# Altium PCB SuperGameBro_RevA0.PcbDoc (part 2 of 2)
Units mil, origin at the board's own origin, x right, y up, seen from the top; angles counter-clockwise.
Board outline 6943 x 4294 mil, 4 copper layers (Top Layer, GND, 3V3P, Bottom Layer), stack 33.234 mil thick; 149 components, 155 nets, 708 pads, 342 vias.
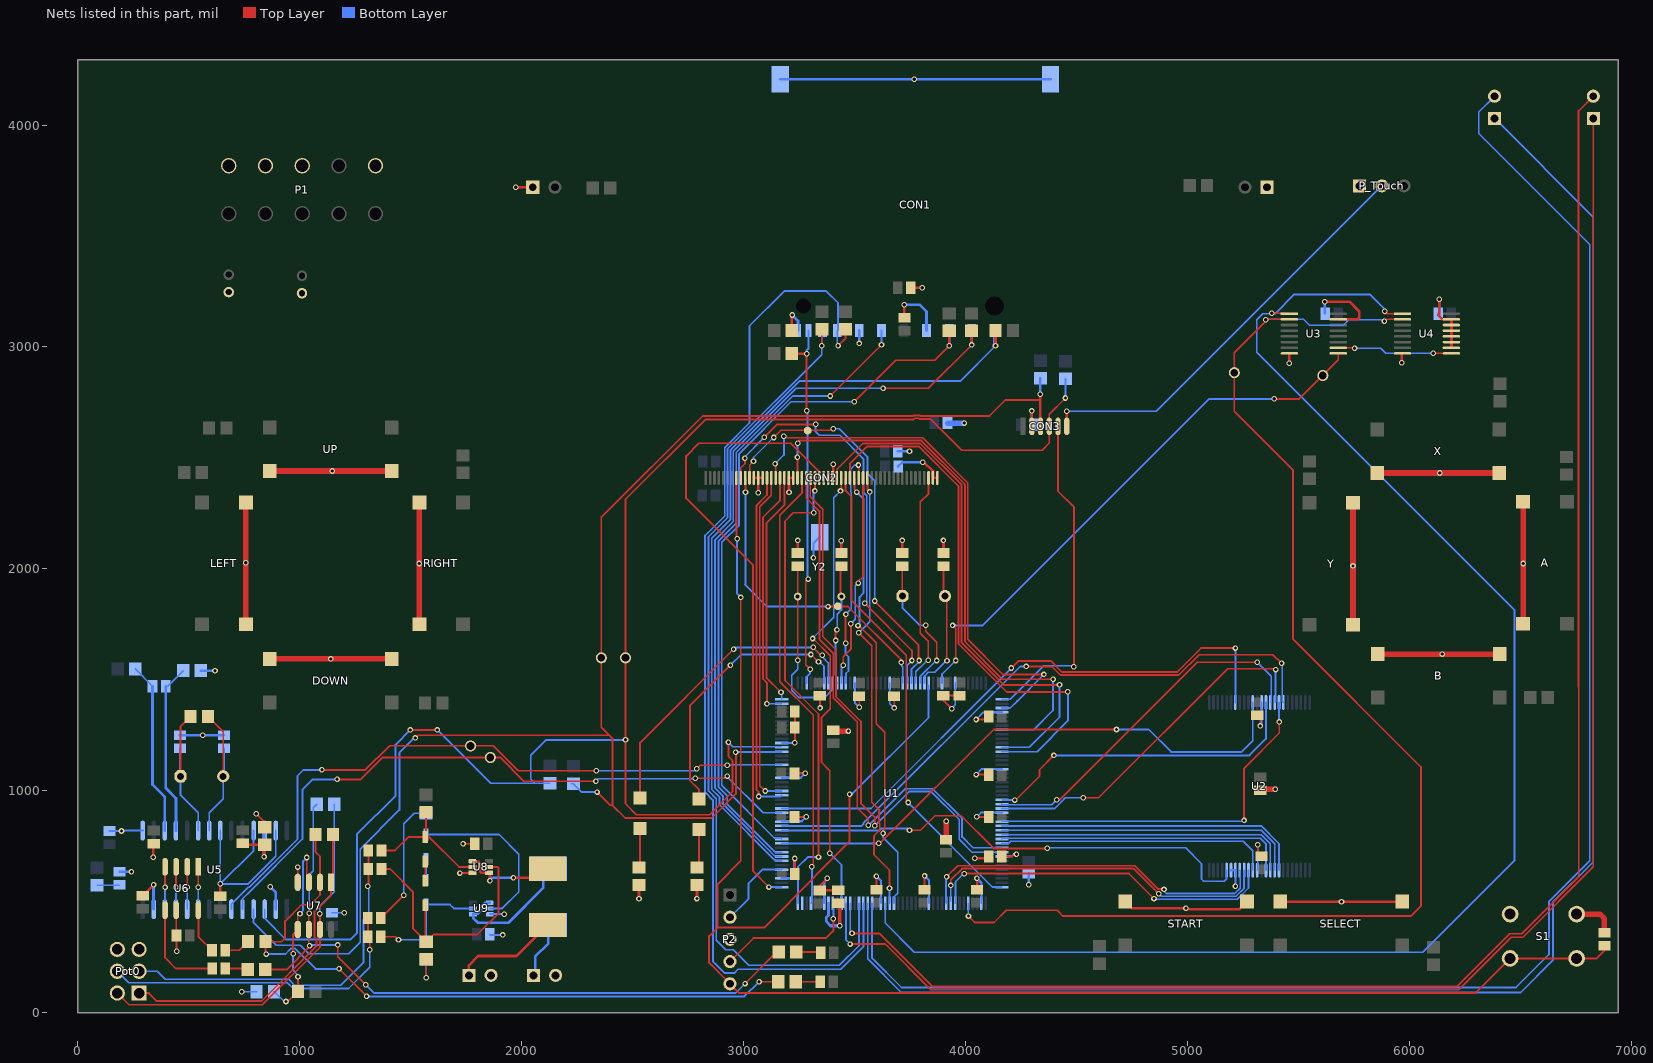
[diagram p4: the nets of this part, all layers, seen from the top]

## Via types
v1: diameter 25, hole 15, Top Layer to Bottom Layer, 342 vias

## Nets (pads, with @x,y where several pads share a name; then routed paths per layer and width w, separated by ;. In a path a pad name is that pad's centre, name@x,y a point inside that pad or via, vN(x,y) a via of type N, cw(c..) or ccw(c..) an arc to the next point about the centre after c; other vN are vias at no path point) (continued)
FMC_D3: U1.143 U2.11 | length 2571.2
  Top Layer w8: v1(3609.56,762.56) 3613.97,762.56 4127.41,1276 v1(4681,1276)
  Bottom Layer w8: U1.143@3172.17,762.56 v1(3609.56,762.56) ; v1(4681,1276) 4826,1276 4927,1175 5245,1175 5295.47,1225.47 U2.11@5295.47,1397.95
FMC_D4: U1.68 U2.14 | length 1484.4
  Top Layer w8: v1(4223,958) 4227,958 4334,1065 4334,1094 v1(4399,1159)
  Bottom Layer w8: U1.68@4165.7,958 v1(4223,958) ; v1(4399,1159) 5280,1159 5354.53,1233.53 U2.14@5354.53,1397.95
FMC_D5: U1.69 U2.15 | length 1624.4
  Top Layer w8: v1(4411.41,959.41) 4425.41,959.41 5045,1579 v1(5315,1579)
  Bottom Layer w8: U1.69@4164.29,939.73 4167.52,936.5 4388.5,936.5 v1(4411.41,959.41) ; v1(5315,1579) 5378,1516 5378,1401.74 U2.15@5376,1399.74
FMC_D6: U1.70 U2.16 | length 1644.7
  Top Layer w8: v1(4531,968) 4600,968 5182,1550 5394,1550 v1(5398,1546)
  Bottom Layer w8: U1.70@4164.29,920.04 4402.45,920.04 4432.91,950.5 4432.91,950.91 4450,968 v1(4531,968) ; U2.16@5395,1399.06 5398,1402.06 v1(5398,1546)
FMC_D7: U1.73 U2.17 | length 1720.7
  Top Layer w8: v1(5256,866) 5256,1101 5415,1260 v1(5415,1310)
  Bottom Layer w8: U1.73@4165.3,862 5252,862 v1(5256,866) ; v1(5415,1310) 5413.58,1311.42 U2.17@5413.58,1397.95 5418.36,1393.17 U2.17@5418.36,1370
FMC_D8: U1.74 U2.32 | length 1401.8
  Bottom Layer w8: U1.74@4164.29,841.3 5333.7,841.3 5413.58,761.42 U2.32@5413.58,642.05
FMC_D9: U1.75 U2.33 | length 1373.7
  Bottom Layer w8: U1.75@4164.29,821.62 5333.38,821.62 5393.9,761.1 U2.33@5393.9,642.05
FMC_D10: U1.76 U2.34 | length 1345.7
  Bottom Layer w8: U1.76@4164.29,801.93 5333.07,801.93 5374.21,760.79 U2.34@5374.21,642.05
FMC_D11: U1.77 U2.35 | length 1320.4
  Bottom Layer w8: U1.77@4164.29,782.24 4167.54,785.5 5329.5,785.5 5354.53,760.47 U2.35@5354.53,642.05
FMC_D12: U1.78 U2.38 | length 1240.6
  Bottom Layer w8: U1.78@4164.29,762.56 4194.56,762.56 4204.5,772.5 5252.5,772.5 5295.47,729.53 U2.38@5295.47,642.05
FMC_D13: U1.96 U2.39 | length 1583.1
  Top Layer w8: v1(3995.5,626.5) 4737.5,626.5 v1(4850,514)
  Bottom Layer w8: U1.96@3953.66,492.88 3955.5,494.71 3955.5,589.5 3987,621 3988,620 3994.5,626.5 v1(3995.5,626.5) ; v1(4850,514) 4853,511 5225.17,511 5275.79,561.61 U2.39@5275.79,642.05
FMC_D14: U1.97 U2.40 | length 1587.3
  Top Layer w8: v1(3934,573) 3934,598 3985,649 4758,649 v1(4872,535)
  Bottom Layer w8: U1.97@3934,502.46 v1(3934,573) ; v1(4872,535) 4883,524 5219.79,524 5256.1,560.31 U2.40@5256.1,642.05
FMC_D15: U1.98 U2.41 | length 1613
  Top Layer w8: v1(3915,612) 3965,662 4763.38,662 4868.88,556.5 4880.91,556.5 4882.41,555 v1(4895,555)
  Bottom Layer w8: U1.98@3915,493.59 3912.5,496.09 3912.5,609.5 v1(3915,612) ; v1(4895,555) 4895,547 4905,537 5214.41,537 5238.5,561.09 5238.5,639.96 U2.41@5236.42,642.05
GND: A.0 B.0 C1.1 C2.1 C3.1 C4.1 C5.1 C6.1 C7.1 C8.1 C9.1 C10.1 C11.1 C12.1 C13.2 C14.2 C15.2 C16.1 C17.1 C18.1 C19.1 C20.1 C21.1 C22.1 C23.1 C24.1 C25.1 C26.1 C27.1 C28.1 C29.1 C30.1 C31.1 C32.1 C34.1 C35.1 C36.1 C38.1 C39.1 C41.1 C42.1 C43.1 C44.1 C47.2 C57.1 C58.1 C62.1 C63.1 C64.1 C65.1 C80.1 CON1.3 CON1.6 CON2.A12 CON2.A13 CON2.A14 CON2.A20 CON2.A21 CON2.A28 CON2.A29 CON2.A30 CON2.A53 CON2.A54 CON3.2 CP1.1 CP2.1 DOWN.0 LEFT.0 LEFT_SHOULDER.1 LS1.2 LS2.2 P1.2 P1.4 P1.6 P1.10 P2.3 P_Touch.1 Pot0.3 Pot0.4 R22.1 R28.2 R33.2 R35.1 R40.2 R_LED0.2 R_LED1.2 RIGHT.0 RIGHT_SHOULDER.1 S1.1 SELECT.0 START.0 U1.14 U1.22 U1.37 U1.48 U1.61 U1.71 U1.90 U1.102 U1.113 U1.126 U1.135 U1.148 U1.158 U1.166 U2.13 U2.37 U2.42 U2.43 U3.8 U3.15 U4.8 U4.10 U4.11 U4.12 U4.13 U4.14 U4.15 U5.2 U5.13 U5.15 U5.22 U5.25 U5.27 U6.6 U7.4 U8.3 U9.3 UP.0 X.0 Y2.3 Y.0 | length 15621.2
  Top Layer w8: U6.6@443,462 443,348.47 C43.1@444.47,347 445,346.47 v1(445,277) ; v1(804,896) 842,858 R22.1@842,835.37 ; U7.4@991,587 v1(991,656) ; v1(1570,157) R33.2@1570,240.63 ; v1(1722,629) 1776.18,629 U8.3@1778,630.82 ; v1(1736,761) C57.1@1788.47,761 ; v1(3345,1373) C13.2@3345,1428.47 ; v1(3522,1376) C24.1@3522,1427.47 ; v1(3679,1373) C23.1@3679,1427.47 ; v1(3938,1370) 3901,1407 3901,1429.47 C21.1@3975,1429.47 ; v1(4048,1321) 4092.47,1321 C20.1@4105.47,1334 ; v1(4049,1073) C19.1@4106.47,1073 ; v1(4051,882) C18.1@4106.47,882 ; C29.1@5315,1339.47 5329,1325.47 v1(5329,1292) ; v1(5318,757) 5318,727.21 5315.16,724.37 C58.1@5335,704.53
  Top Layer w10: v1(340,700) 340,759.47 C36.1@342,761.47 ; C7.1@3230.53,882 v1(3283,882) ; C6.1@3230.53,1079 v1(3278,1079) ; v1(3231.53,1215.53) C5.1@3231.53,1358 ; v1(3378,605) 3345,572 3345,551.53 C15.2@3427,551.53 ; C10.1@3599,556.53 v1(3599,615) ; C11.1@3816,556.53 v1(3816,616) ; v1(4052,605) 4053,604 C12.1@4053,555.53
  Top Layer w12: C35.1@292,526.53 341,575.53 v1(341,576) ; C38.1@642,524.53 v1(642,580) ; v1(1974,3720) LEFT_SHOULDER.1@2050,3720 ; v1(2529,513) R_LED1.2@2529,575.63 ; v1(2790,514) R_LED0.2@2790,575.63 ; CON2.A12@3046.54,2410 CON2.A13@3066.22,2410 ; v1(3066.22,2342.78) CON2.A13@3066.22,2410 ; CON2.A14@3085.91,2410 CON2.A13@3066.22,2410 ; v1(3205,2345) 3205,2409.02 CON2.A20@3204.02,2410 CON2.A21@3223.7,2410 ; C8.1@3230.53,625 v1(3230.53,694.53) ; C3.1@3244,2071.53 v1(3244,2128) ; CON2.A28@3361.5,2410 CON2.A29@3381.18,2410 CON2.A30@3400.87,2410 3403.65,2412.78 3403.65,2470.64 v1(3404,2471) ; C4.1@3441,2071.53 v1(3441,2126) ; C1.1@3715,2071.53 v1(3715,2128) ; C27.1@3725,3132.53 v1(3725,3190) ; C28.1@3754.53,3267 v1(3806,3267) ; v1(3808,2480) 3814,2480 3853.62,2440.38 CON2.A53@3853.62,2410 CON2.A54@3873.31,2410 ; C2.1@3901,2071.53 v1(3901,2128) ; v1(4042,696) 4098.47,696 C14.2@4105.47,703 ; C20.1@4104.88,1334.59 C20.1@4104.88,1339.12 ; CON3.2@4299.37,2642.28 v1(4299.37,2711.63) ; START.0@4721,499 START.0@4720,500 4750,470 v1(4994,470) ; v1@4992,466 5235.21,466 START.0@5269.21,500 ; SELECT.0@5420,500 v1(5695,500) SELECT.0@5969.21,500 ; v1(5459,2926) 5459,2969.86 U3.8@5460,2970.87 ; v1(5619,3204) 5730.75,3204 5775,3159.75 5775,3133 5766.41,3124.41 U3.15@5680.47,3124.41 ; v1(5967,2929) 5967,2967.86 U4.8@5970,2970.87 ; v1(6135,3215) 6135,3146 6131.47,3142.47 6149.54,3124.41 U4.15@6190.47,3124.41 U4.14@6190.47,3098.82 U4.13@6190.47,3073.23 U4.12@6190.47,3047.64 U4.11@6190.47,3022.05 U4.10@6190.47,2996.46
  Top Layer w25: LEFT.0@757,1749.79 v1(757,2027) LEFT.0@757,2299 ; DOWN.0@864.79,1594 v1(1139,1594) DOWN.0@1414,1594 ; UP.0@864.79,2441 v1(1146,2441) UP.0@1414,2441 ; RIGHT.0@1539,1749.79 v1(1539,2024) RIGHT.0@1539,2299 ; C16.1@3405,1273.53 3409.53,1269 v1(3473,1269) ; C17.1@3913,780.53 v1(3913,862) ; C30.1@5329,1002.47 5331,1000.47 5336.53,1006 v1(5397,1006) ; Y.0@5747,1747.79 v1(5747,2013) Y.0@5747,2297 ; X.0@5856.79,2432 v1(6138,2432) X.0@6406,2432 ; B.0@5859,1616 v1(6149,1616) B.0@6408.21,1616 ; A.0@6514,1753 v1(6514,2024) A.0@6514,2302.21 ; S1.1@6754.75,444.13 6859.39,444.13 6880,423.53 C26.1@6880,360.53
  Bottom Layer w8: U5.22@642,820.33 v1(642,580) ; v1(739,94) R35.1@804.63,94 ; U5.25@792,820.33 792,730 v1(642,580) ; U5.27@892,820.33 892,705 767,580 v1(642,580) ; C47.2@1145,449.53 v1(1200.47,449.53) ; v1(1570,157) R40.2@1570,239.63 ; U9.3@1856,443.82 v1(1921.82,443.82) ; C44.1@1856.53,353 1859.53,350 v1(1915,350) ; U1.14@3501.91,1486 3501.91,1396.09 v1(3522,1376) ; U1.22@3659.38,1486 3659.38,1392.62 v1(3679,1373) ; v1(3938,1370) 3954.66,1386.66 U1.37@3954.66,1486 ; v1(4048,1321) 4080.11,1353.11 4125.89,1353.11 ; v1(4049,1073) 4074.2,1098.2 U1.61@4165.29,1098.2 ; v1(4051,882) 4070.35,901.35 U1.71@4165.29,901.35 ; v1@5216.73,570.27 v1(5217,570) U2.42@5217,641.78 ; U2.37@5315.16,642.05 5318,644.89 v1(5318,757) ; v1(5329,1292) 5334.84,1297.84 U2.13@5334.84,1397.95
  Bottom Layer w10: C41.1@143,818.53 v1(196.53,818.53) ; C42.1@188,634.53 v1(241.47,634.53) ; v1@198.33,820.33 U5.15@292,820.33 ; U1.148@3173.17,861.99 3262.99,861.99 v1(3283,882) ; U1.158@3173.17,1058.84 3257.84,1058.84 v1(3278,1079) ; U1.166@3173.95,1215.53 v1(3231.53,1215.53) ; v1(3315,2050) 3315,2115.14 Y2.3@3342.57,2142.72 ; U1.126@3364.11,493.88 3364.11,588.89 3378,602.78 v1(3378,605) ; v1(3599,615) 3620.02,593.98 U1.113@3620.02,493.88 ; v1(3816,616) 3836.55,595.45 U1.102@3836.55,493.88 ; v1(4052,605) 4072.77,584.23 U1.90@4072.77,493.88
  Bottom Layer w12: v1(341,576) 341,467 U5.13@342,466 ; C34.1@460,1250.53 v1(562.53,1250.53) C39.1@658,1250.53 ; R28.2@553.37,1541 v1(618,1541) ; v1(867,567) 892,542 U5.2@892,466 ; CON1.3@3165.48,4206.16 v1(3770.16,4206.16) CON1.6@4383.59,4206.16 ; U1.135@3172.17,605.08 3217.08,605.08 3230,618 3230,694 v1(3230.53,694.53) ; v1(3522.17,3015.83) CON1.6@3522.17,3074.27 ; C63.1@3695.53,2530 v1(3748,2530) ; C62.1@3696.53,2461 3715.53,2480 v1(3808,2480) ; v1(3725,3190) 3795,3190 3824.93,3160.07 CON1.3@3824.93,3074.27 ; 4125.89,1353.11 U1.48@4164.29,1353.11 ; v1(4286,576) C80.1@4286,625.47 ; C64.1@4299.37,2659.16 v1(4299.37,2711.63) ; U2.43@5197.05,642.05 U2.42@5216.73,642.05 ; C31.1@5619,3152.47 v1(5619,3204) ; C32.1@6131.47,3150 6135,3153.53 v1(6135,3215)
  Bottom Layer w25: C65.1@3919.53,2657 v1(3995,2657)
I2C1_SCL: CON3.3 pad.0 R20.2 R23.1 U1.164 U5.4 | length 7508.4
  Top Layer w8: v1(1521,1238) 1533.5,1250.5 2394.5,1250.5 ; v1(2340,994) 2399,935 2409,935 ; v1(2964,1174) 2965.5,1172.5 2965.5,985.5 2857,877 2467,877 2409,935 ; 4338,2761 4180,2761 4108,2689 3797.79,2689 3795.29,2691.5 3766.71,2691.5 3764.21,2689 2816,2689 2359,2232 2359,1286 2409,1236 2409,935
  Top Layer w12: 4337,2762 v1(4337,2787) ; CON3.3@4338,2643.02 4338,2761
  Bottom Layer w8: U5.4@792,466 792,405 893.5,303.5 1001.5,303.5 1040,265 1220,265 1272.5,317.5 1272.5,737.07 1449,913.57 1449,1171 1516,1238 v1(1521,1238) ; R23.1@2223.37,1031.63 R23.1@2233,1031.63 2270.63,994 v1(2340,994) ; v1(2964,1174) 3170.22,1174 U1.164@3172.17,1175.94
  Bottom Layer w12: v1(4337,2787) 4337,2857.63 R20.2@4338,2858.63
I2C1_SDA: CON3.4 pad.1 R21.2 R24.1 U1.165 U5.3 | length 7688.7
  Top Layer w8: v1(1498,1274) v1(1620,1274) ; v1(2932,1218) 2932,1155.61 2950.5,1137.11 2950.5,995.5 2847,892 2517.21,892 2468,941.21 2468,2313 2827.5,2672.5 3766.09,2672.5 3772.09,2678.5 3789.91,2678.5 3793.41,2675 3843,2675 3983,2535 4346,2535 4378.11,2567.11 CON3.4@4378.11,2642.28 4378.11,2697.11 v1(4451,2770)
  Bottom Layer w8: U5.3@842,466 842,425 938,329 1228,329 1257.5,358.5 1257.5,803.5 1432,978 1432,1208 v1(1498,1274) ; v1(1620,1274) 1860.37,1033.63 2060.37,1033.63 ; R24.1@2127,1033.63 2060.37,1033.63 ; v1(2468,1229) 2111,1229 2041,1159 2041,1053 2060.37,1033.63 ; v1(2932,1218) 2951.59,1198.41 U1.165@3169.39,1198.41 ; v1(4451,2770) R21.2@4451,2856.63
INPUT_LATCH: U1.112 U3.1 U4.1 | length 6899.7
  Top Layer w8: v1(5380,3152) 5458,3152 U3.1@5460,3150 ; v1(5890,3161) 5890,3152 5892,3150 U4.1@5970,3150
  Bottom Layer w8: U1.112@3638.7,492.88 3638.7,404 3770.2,272.5 6060.5,272.5 6475,687 6475,1814 5313,2976 5313,3122 5341,3150 5395.87,3150 5482.86,3237 5823,3237 5890,3170 v1(5890,3161)
LCD_SPI_NEN: CON2.A9 U1.26 | length 1900.7
  Top Layer w8: CON2.A9@2987.48,2410 2987.48,2454.48 3006.5,2473.5 v1(3006.5,2498) ; v1(3094,2593) 3152,2651 v1(3325,2651) ; v1(3547,1845) 3546,1845 3759,1632 v1(3759,1587)
  Bottom Layer w8: v1(3006.5,2498) 3006.5,2505.5 v1(3094,2593) ; v1(3325,2651) 3325,2621 3324,2620 3342,2602 3435,2602 3540.35,2496.65 3540.35,2344.94 3555.5,2329.79 3555.5,1853.5 v1(3547,1845) ; U1.26@3737.13,1485 3737.13,1565.13 v1(3759,1587)
LCKT: U5.11 U6.3 | length 191.4
  Top Layer w8: v1@442,556 442,656 U6.3@443,657
  Bottom Layer w8: U5.11@442,466 v1@442,556
  other v1: 442,565
LTDC_B3: CON2.A15 U1.154 | length 1566.1
  Top Layer w8: v1(3068,974) 3068,994.6 3058,1004.6 3058,2285.21 3105.59,2332.8 CON2.A15@3105.59,2410
  Bottom Layer w8: v1(3068,974) 3068.32,974.32 3167.39,974.32 U1.154@3172.17,979.09
LTDC_B4: CON2.A16 U1.155 | length 1517.9
  Top Layer w8: v1(3097.22,998.78) 3073,1023 3073,2279 3125.28,2331.28 CON2.A16@3125.28,2410
  Bottom Layer w8: v1(3097.22,998.78) U1.155@3172.17,998.78
LTDC_B5: CON2.A17 U1.47 | length 2488
  Top Layer w8: v1(3142,2473) 3144.96,2470.04 CON2.A17@3144.96,2410 ; v1(3182,2598) 3189,2591 3807,2591 4011,2387 4011,1682 4169,1524 v1(4354,1524)
  Bottom Layer w8: v1(3142,2473) 3182,2513 v1(3182,2598) ; U1.47@4164.29,1372.79 4201.79,1372.79 4233,1404 4234,1404 v1(4354,1524)
LTDC_B6: CON2.A18 U1.175 | length 1123.2
  Top Layer w8: v1(3105.48,1392.48) 3105.48,1486.31 3088,1503.79 3088,2233 3164.65,2309.65 CON2.A18@3164.65,2410
  Bottom Layer w8: v1(3105.48,1392.48) U1.175@3172.17,1392.48
LTDC_B7: CON2.A19 U1.176 | length 1060.9
  Top Layer w8: v1(3169,1444) 3103,1510 3103,2205 3184.33,2286.33 3184.33,2335.26 3183.5,2336.09 3183.5,2409.17 CON2.A19@3184.33,2410
  Bottom Layer w8: v1(3169,1444) 3172.17,1440.83 U1.176@3172.17,1412.17
LTDC_CLK: CON2.A38 U1.111 | length 2023
  Top Layer w8: v1(3519,1712.31) 3578,1653.31 3578,948 3614,912 3611,909 3611,853.41 3613.5,850.91 3613.5,822.91 3588.06,797.47 3588.06,711.94 3658,642 v1(3658,560) ; CON2.A38@3558.35,2410 3558.35,2357.35 v1(3569,2346.69)
  Bottom Layer w8: v1(3519,1712.31) 3569,1762.31 v1(3569,2346.69) ; U1.111@3658,493.26 v1(3658,560)
LTDC_DE: CON2.A52 U1.28 | length 971.5
  Top Layer w8: v1@3827,1587 3827,1586 3833,1592 3833,1673.77 3796.5,1710.27 3796.5,2301.5 3833.94,2338.94 CON2.A52@3833.94,2410
  Bottom Layer w8: U1.28@3776.49,1485 3776.49,1535.49 3821,1580
  other v1: 3833,1588
LTDC_G2: CON2.A22 U1.52 | length 2599.4
  Top Layer w8: v1(3243,2503) 3243,2410.39 CON2.A22@3243.39,2410 ; v1(3244,2566) 3244,2573 3249,2578 3801.62,2578 3998,2381.62 3998,1671 4166.5,1502.5 4394.5,1502.5 v1(4395,1503)
  Bottom Layer w8: v1(3243,2503) 3243,2572 3243.39,2572.39 3244,2571.77 v1(3244,2566) ; U1.52@4164.29,1274.37 4307.37,1274.37 4395,1362 v1(4395,1503)
LTDC_G3: CON2.A23 U1.129 | length 2025.4
  Top Layer w8: CON2.A23@3263.07,2410 3263.07,2341.07 3163,2241 3163,1492 3313.81,1341.19 3313.81,662.81 v1(3308,657)
  Bottom Layer w8: U1.129@3304.05,492.88 3308.83,497.66 v1@3308.83,657
LTDC_G4: CON2.A24 U1.79 | length 2511.6
  Top Layer w8: CON2.A24@3282.76,2410 3282.76,2319.48 3342,2260.23 3342,1682 3404,1620 3404,1418.62 3513,1309.62 3513,922 3562,873 v1(3562,844)
  Bottom Layer w8: v1(3562,844) 3563.59,844 3728.59,1009 3851.77,1009 3985,875.77 3985,792 4034.12,742.88 U1.79@4164.29,742.88
LTDC_G5: CON2.A25 U1.80 | length 2491
  Top Layer w8: CON2.A25@3302.44,2410 3300.5,2408.06 3300.5,2324.5 3357,2268 3357,1695 3417,1635 3417,1424 3529,1312 3529,943 3592,880 v1(3592,842)
  Bottom Layer w8: v1(3592,842) 3746,996 3846.38,996 3972,870.38 3972,781 4029.81,723.19 U1.80@4164.29,723.19
LTDC_G6: CON2.A26 U1.132 | length 2167.4
  Top Layer w8: v1(3316,2253) 3225,2253 3187,2215 3187,1497 3338,1346 v1(3338,701) ; v1(3322,2351) CON2.A26@3322,2409.88
  Bottom Layer w8: U1.132@3245,492.88 3245,656 3290,701 v1(3338,701) ; v1(3316,2253) 3316,2357 v1(3322,2351)
LTDC_G7: CON2.A27 U1.133 | length 2859.8
  Top Layer w8: v1(3114.71,565.71) 3043,637.42 3043,2017 2741,2319 2741,2508 2799,2566 3212.8,2566 3341.81,2436.99 CON2.A27@3341.81,2410
  Bottom Layer w8: v1(3114.71,565.71) U1.133@3172.17,565.71
LTDC_HSYNC: CON2.A36 U1.12 | length 1086
  Top Layer w8: v1(3460,1665) 3460,1794 v1(3461.53,1795.53) ; v1(3518,2468) 3518,2463 v1@3518.98,2462.02 ; CON2.A36@3518.98,2410 v1@3518.98,2460
  Bottom Layer w8: v1(3460,1665) 3460,1615.94 3473,1602.94 3473,1539.6 3461.53,1528.13 U1.12@3461.53,1485 ; v1(3461.53,1795.53) 3486,1820 3486,2345.54 3483,2348.54 3483,2450 3501,2468 v1(3518,2468)
LTDC_R3: CON2.A31 U1.56 | length 2417.2
  Top Layer w8: CON2.A31@3418.65,2411.91 3418.65,2420.87 3422,2424.23 3422,2450 3537,2565 3796.23,2565 3983,2378.23 3983,1667.62 4173.62,1477 v1(4424,1477)
  Bottom Layer w8: U1.56@4164.29,1195.63 4287.63,1195.63 4424,1332 v1(4424,1477)
LTDC_R4: CON2.A32 U1.122 | length 2058.5
  Top Layer w8: v1(3311,1686) 3313.23,1686 3391,1608.23 3391,1370 3352,1331 3352,1127 3389,1090 v1(3389,718) ; v1(3437,2351) 3440.24,2354.24 CON2.A32@3440.24,2410
  Bottom Layer w8: v1(3311,1686) 3407,1782 3407,2321 v1(3437,2351) ; v1(3389,718) 3441.85,665.15 U1.122@3441.85,492.88
LTDC_R5: CON2.A33 U1.88 | length 2171.5
  Top Layer w8: CON2.A33@3459.92,2410 3459.92,2351.08 3487,2324 3487,1857 3733.12,1610.88 3733.12,947 v1(3742,947)
  Bottom Layer w8: v1@3738,950 4122.29,565.71 U1.88@4164.29,565.71 ; v1@3741,947 v1(3742,947)
LTDC_R6: CON2.A34 U1.57 | length 2440.2
  Top Layer w8: CON2.A34@3479.61,2410 3479.61,2473.61 3558,2552 3790,2552 3969,2373 3969,1662 4186,1445 4461,1445 v1(4462,1446)
  Bottom Layer w8: U1.57@4164.29,1175.94 4322.94,1175.94 4462,1315 v1(4462,1446)
LTDC_R7: CON2.A35 U1.110 | length 2041.2
  Top Layer w8: CON2.A35@3500,2409.29 3500,2357 v1(3511,2346) ; v1@3514,1743.46 3517.54,1747 3598,1666.54 3598,1302 3637,1263 3637,830 3629,822 v1(3629,808) ; v1@3514.85,1744.31 v1(3516,1744.31)
  Bottom Layer w8: v1(3511,2346) 3540.5,2316.5 3540.5,1890.29 3523,1872.79 3523,1755 3514,1746 3515.69,1744.31 v1(3516,1744.31) ; v1(3629,808) 3629,788 3695,722 3695,538.28 3678.07,521.35 U1.110@3678.07,492.88
LTDC_VSYNC: CON2.A37 U1.11 | length 965.5
  Top Layer w8: v1(3449,1565) 3449,1604 3485,1640 v1(3484,1752) ; v1(3517,1936) 3517,1943.34 3538.66,1965 CON2.A37@3538.66,2410
  Bottom Layer w8: U1.11@3441.85,1485 3441.85,1557.85 v1(3449,1565) ; v1(3484,1752) 3504,1772 3504,1923 v1(3517,1936)
MCLK: U5.12 U6.4 | length 191.4
  Top Layer w8: v1(393,565) U6.4@393,657
  Bottom Layer w8: U5.12@392,466 392,564 v1(393,565)
MP3_DR: U1.131
NetC33_2: C33.2 R22.2 U5.26 | length 274.9
  Top Layer w12: C33.2@743,762.47 748.84,756.63 R22.2@842,756.63 839,753.63 v1(839,703)
  Bottom Layer w12: v1(839,703) 839,817.33 U5.26@842,820.33
NetC42_2: C42.2 R27.2 | length 99.2
  Bottom Layer w8: R27.2@87,573.63 C42.2@186.16,573.63
NetC45_1: C45.1 C50.1 Pot0.2 | length 1596.5
  Top Layer w8: v1@1309.47,570 C50.1@1309.47,647 C45.1@1309.47,731
  Bottom Layer w8: Pot0.2@276,186.43 357.57,186.43 394,150 949.55,150 976.05,123.5 1184.5,123.5 1287.5,226.5 1287.5,420.79 1311,444.29 1311,565 v1(1306,570)
NetC46_2: C46.2 R31.1 | length 119.3
  Top Layer w8: C46.2@663.53,280.59 727.63,280.59 R31.1@766.63,319.59
NetC48_1: C48.1 U8.1 U8.4 | length 450.8
  Top Layer w12: U8.1@1778,682 1780,680 1805,680 1814,671 1814,635 1818.18,630.82 U8.4@1852.8,630.82 1857,626.62 v1(1857,594) ; v1(1963,608) 2057.23,608 2066.23,599 C48.1@2116,648.77
  Bottom Layer w12: v1(1857,594) 1854,597 1865,608 v1(1963,608)
NetC48_2: C48.2 LS1.1 | length 474.5
  Top Layer w12: LS1.1@1762,168 1762,213 1804,255 1975.77,255 C48.2@2116,395.23
NetC49_2: C49.2 R32.1 | length 110.1
  Top Layer w8: R32.1@3235.37,139 C49.2@3345.47,139
NetC51_1: C51.1 U9.1 U9.4 | length 609.1
  Bottom Layer w12: U9.1@1856,495 1834,495 1819,480 1819,463 1801,445 1782.38,445 U9.4@1781.2,443.82 1781.2,426.8 1803,405 1940,405 2097,562 2097,625.77 C51.1@2120,648.77
NetC51_2: C51.2 LS2.1 | length 255
  Bottom Layer w12: LS2.1@2053,168 2061,176 2061,252 2120,311 C51.2@2120,395.23
NetC52_1: C52.1 C56.1 Pot0.5 | length 1449.8
  Top Layer w8: Pot0.5@177.57,186.43 Pot0.5@192.57,186.43 ; C52.1@1306.47,426 1307,425.47 1307,354 1315,346 v1(1315,283)
  Bottom Layer w8: Pot0.5@177.57,186.43 229,135 943.34,135 969.84,108.5 1219.5,108.5 1315,204 v1(1315,283)
NetC53_2: C53.2 R38.1 | length 103
  Top Layer w8: C53.2@664.53,198.59 761.04,198.59 R38.1@765.63,194
NetC55_2: C55.2 R39.1 | length 111.1
  Top Layer w8: R39.1@3238.37,273.31 C55.2@3349.47,273.31
NetCON1_11: CON1.11 R7.2 | length 151.3
  Top Layer w12: R7.2@3217.37,3074 3217.37,3142.37 v1(3219,3144)
  Bottom Layer w12: v1(3219,3144) 3245.4,3117.6 CON1.11@3245.4,3074.27
NetD1_K: D1.K D2.A | length 86.8
  Top Layer w8: D2.A@1566,594.12 D1.K@1566,680.88
NetD3_K: D3.K D4.A | length 95.8
  Bottom Layer w8: D4.A@1569,597.12 D3.K@1569,692.88
NetLED0_K: LED0.K R_LED0.1 | length 161.7
  Top Layer w8: R_LED0.1@2799,663.37 LED0.K@2799,825.1
NetLED1_K: LED1.K R_LED1.1 | length 170.7
  Top Layer w8: R_LED1.1@2534,659.37 LED1.K@2534,830.1
NetPot0_1: Pot0.1 R30.2 U7.1 | length 1457.8
  Top Layer w8: Pot0.1@276,88 320,88 356,52 827.55,52 1076,300.45 1076,331.6 1066.5,341.1 1066.5,454.73 1080.27,468.5 1080.5,468.5 1141,529 U7.1@1141,587 1149.37,595.37 R30.2@1149.37,802
NetPot0_6: Pot0.6 R37.2 U7.7 | length 1715
  Top Layer w8: Pot0.6@177.57,88 230.57,35 831.77,35 1091,294.23 U7.7@1091,374.4 1091,444 v1(1090,445)
  Bottom Layer w8: v1(1090,445) 1090,480 1155.37,545.37 R37.2@1155.37,939
NetR30_1: R30.1 R31.2 R32.2 U7.2 | length 3149.4
  Top Layer w8: v1(849,264) 845.37,267.63 R31.2@845.37,319.59 917.59,319.59 934,336 934,412.23 1007.77,486 1047,486 1091,530 U7.2@1091,587 1091,705 1070.63,725.37 R30.1@1070.63,802 ; v1(1177,197) v1(1301,73) ; v1(3070,139) R32.2@3156.63,139
  Bottom Layer w8: v1(849,264) 935.77,264 960.27,288.5 979.73,288.5 1071.23,197 v1(1177,197) ; v1(1301,73) 3004,73 v1(3070,139)
NetR34_2: R34.2 R35.2 U7.3 U7.5 | length 901.2
  Top Layer w8: v1(938,50) 946.63,50 R34.2@991.63,95 991,95.63 992,96.63 v1(992,162) ; v1(970,265) 970,353.4 U7.5@991,374.4 991,436 v1(1001,446) ; v1(1031,699) 1031,597 U7.3@1041,587
  Bottom Layer w8: R35.2@883.37,94 884.37,95 929.37,50 v1(938,50) ; v1(970,265) 970,191 992,169 v1(992,162) ; v1(1001,446) 1015,460 1015,683 v1(1031,699)
NetR37_1: R37.1 R38.2 R39.2 U7.6 | length 3213
  Top Layer w8: R38.2@844.37,194 941,194 1041,294 U7.6@1041,374.4 1041,446 v1(1043,448) ; v1(1171,305) 1171,252 v1(1298,125) ; v1(3007,131) 3148.31,272.31 R39.2@3158.63,272.31
  Bottom Layer w8: v1(1043,448) 1043,621.79 1061,639.79 1061,923.37 R37.1@1076.63,939 ; v1@1044,297 1052,305 v1(1171,305) ; v1(1298,125) 1335,88 2964,88 v1(3007,131)
  other v1: 1044,302
NWAKE_TOUCH: CON3.6 P_Touch.2 | length 1908.6
  Top Layer w12: CON3.6@4456.85,2642.28 v1(4456.85,2709.85)
  Bottom Layer w8: v1(4456.85,2709.85) 4860.85,2709.85 P_Touch.2@5877,3726
OSC_MAIN_IN: C1.2 U1.29 Y1.1 | length 639.3
  Top Layer w8: Y1.1@3715,1877.94 C1.2@3715,2012.47 ; v1(3821,1746) 3821,1719 3871,1669 v1(3871,1587)
  Bottom Layer w8: Y1.1@3715.94,1877 3715.94,1824.06 3794,1746 v1(3821,1746) ; U1.29@3796.18,1485 3796.18,1515.18 3868,1587 v1(3871,1587)
OSC_MAIN_OUT: C2.2 U1.30 Y1.2 | length 597.1
  Top Layer w8: Y1.2@3901,1884.06 C2.2@3901,2012.47 ; Y1.2@3908.06,1877 3916,1869.06 3916,1595.87 3907.13,1587 3908.13,1586 v1(3917,1586)
  Bottom Layer w8: U1.30@3815.87,1485 3815.87,1516.48 3833.38,1534 3861,1534 3913,1586 v1(3917,1586)
OSC_RTC_IN: C3.2 U1.9 Y2.1 | length 782.6
  Top Layer w8: Y2.1@3244,1877.94 C3.2@3244,2012.47 ; v1(3244.15,1587.85) Y2.1@3244.15,1875
  Bottom Layer w8: v1(3244.15,1587.85) 3244.15,1548.15 3217,1521 3217,1452 3249,1420 3365.95,1420 U1.9@3402.48,1456.52
OSC_RTC_OUT: C4.2 U1.10 Y2.2 | length 540.9
  Top Layer w8: v1@3415,1671.33 v1(3415,1677) 3415,1720 v1(3421,1726) ; Y2.2@3437.06,1877 C4.2@3437.06,2008.54
  Bottom Layer w8: v1(3415,1677) 3415,1520.64 3417.39,1518.26 3417.39,1489.78 U1.10@3422.17,1485 ; v1(3421,1726) 3422,1727 3422,1796 3441,1815 Y2.2@3441,1875
OUTL: C46.1 U6.8 | length 206.9
  Top Layer w8: U6.8@543,462 543,342.06 C46.1@604.47,280.59
OUTR: C53.1 U6.5 | length 447.5
  Top Layer w8: U6.5@393,462 393,247 441.41,198.59 C53.1@605.47,198.59
PVDD: C40.2 R26.2 U5.17 | length 784
  Bottom Layer w8: R26.2@258.37,1549 C40.2@336.37,1471
  Bottom Layer w12: C40.2@336.47,1471 336.47,1027.53 392,972 U5.17@392,820.33
PVSS: C40.1 R28.1 U5.18 | length 778
  Bottom Layer w8: C40.1@395.53,1471 404.63,1471 R28.1@474.63,1541
  Bottom Layer w12: C40.1@395.53,1471 396,1470.53 396,1012 442,966 U5.18@442,820.33
RAM_NCS: U1.151 U2.7 | length 2631.1
  Top Layer w8: v1@4207.31,1552.69 4239.62,1585 4385,1585 4435.5,1534.5 4953.5,1534.5 5062,1643 v1(5217,1643)
  Bottom Layer w8: U1.151@3172.17,920.04 3574.66,920.04 4207,1552.38 v1(4207,1553) ; U2.7@5217,1398.22 v1(5217,1643)
RAM_NOE: U1.146 U2.44 | length 2247.8
  Top Layer w8: v1(3748,821.62) 3797.62,821.62 3863,887 3980,887 4127,740 v1(4369,740)
  Bottom Layer w8: U1.146@3172.17,821.62 3173.28,820.5 3611.09,820.5 3620.09,829.5 3740.12,829.5 v1(3748,821.62) ; v1(4369,740) 4371.5,742.5 4992.5,742.5 5064,671 5064,602 5074,592 5166,592 5177.36,603.36 U2.44@5177.36,642.05
RAM_NWE: U1.147 U2.18 | length 2802.2
  Top Layer w8: v1(4274,1560) 4388.79,1560 4427.29,1521.5 4961.71,1521.5 5053.21,1613 5386,1613 v1(5425,1574)
  Bottom Layer w8: U1.147@3172.17,841.3 3533.3,841.3 3540.5,848.5 3540.5,852.91 4247.59,1560 v1(4274,1560) ; v1(5425,1574) 5428.49,1570.51 5428.49,1402.73 U2.18@5433,1398.22
RESET: C26.2 CON2.A8 P2.5 S1.0 U1.31 | length 8038.2
  Top Layer w8: CON2.A8@2967.8,2410 2967.8,2139.2 v1(2971,2136) ; v1(2988,1871) 2987.5,1871.5 2987.5,683.5 2883,579 2883,383 ; v1(3478,984) 3478,771.41 3323.5,616.91 3323.5,613.96 3092.54,383 2883,383 ; 6880,278.47 6845.66,244.13 S1.0@6754.75,244.13 S1.0@6454.75,244.13 6298.61,88 2981,88 P2.5@2939,130 2845,224 2845,345 2883,383
  Bottom Layer w8: v1(2971,2136) 2971,1888 v1(2988,1871) ; v1(3478,984) 3488,984 3834,1330 U1.31@3834,1473.89
SCKT: U5.10 U6.2 | length 190
  Top Layer w8: v1@493,559 U6.2@493,657
  Bottom Layer w8: U5.10@493,467 v1@493,559
  other v1: 493,565
SD_DETECT: CON1.10 R6.2 U1.3 | length 1677.7
  Top Layer w8: v1(3284.37,2969.63) 3284.37,2721.78 v1@3289.15,2717 ; v1(3291,1954) 3280.5,1943.5 3280.5,1567.5 v1(3300,1548)
  Top Layer w10: R6.2@3217.37,2971 3218.74,2969.63 v1(3284.37,2969.63)
  Bottom Layer w8: U1.3@3284.37,1485 3284.37,1513.48 3300,1529.1 v1(3300,1548) ; v1(3285,2712) 3288,2709 3288,1957 v1(3291,1954)
  Bottom Layer w10: v1(3284.37,2969.63) 3284.37,2984.72 3292,2992.35 ; 3292.65,2993 CON1.10@3292.65,3074.27
SDIO_CK: CON1.5 U1.141 | length 2889.5
  Top Layer w8: v1(3391,2779) v1(3621.78,3009.78)
  Bottom Layer w8: U1.141@3172.17,723.19 3143.69,723.19 2927,939.88 2927,977.72 2887,1017.72 2887,2125.21 2967,2205.21 2967,2524.38 3221.62,2779 v1(3391,2779) ; v1(3621.78,3009.78) CON1.5@3621.78,3074.27
SDIO_CMD: CON1.2 R1.1 U1.144 | length 3181.2
  Top Layer w8: v1(3499,2753) 3686,2940 3861,2940 v1(3927,3006)
  Top Layer w12: v1(3927,3006) R1.1@3927,3072.63
  Bottom Layer w8: U1.144@3172.17,782.24 3167.39,787.02 3138.91,787.02 2902,1023.93 2902,2119 2980,2197 2980,2519 3214,2753 v1(3499,2753)
  Bottom Layer w12: v1(3927,3006) CON1.2@3927,3074.17
SDIO_D0: CON1.7 R5.1 U1.117 | length 4674.7
  Top Layer w8: v1(3426,3006) 3460,3040 R5.1@3460,3079.63
  Bottom Layer w8: CON1.7@3422.57,3074.27 3422.57,3009.43 v1(3426,3006) ; CON1.7@3426,3074.27 3426,3199 3373,3252 3184,3252 3027,3095 3027,2657.92 2915,2545.92 2915,2238.07 2827,2150.07 2827,992.87 2862,957.87 2862,231 2915,178 2958,178 2975,195 3438,195 3540.28,297.28 U1.117@3540.28,492.88
SDIO_D1: CON1.8 R4.1 U1.118 | length 3968.5
  Top Layer w8: v1(3353,3005) R4.1@3353,3079.63
  Bottom Layer w8: CON1.8@3355.64,3074.27 3353,3071.63 v1(3353,3005) 3353,2965.54 2928,2540.54 2928,2229.85 2842,2143.85 2842,999.08 2877,964.08 2877,326 2920,283 2954,283 3024,213 3432,213 3520.59,301.59 U1.118@3520.59,492.88
SDIO_D2: CON1.9 R3.1 U1.139 | length 3556.5
  Top Layer w12: v1(4135.63,3005.37) R3.1@4135.63,3075
  Bottom Layer w8: U1.139@3172.17,683.82 3143.69,683.82 2892,935.51 2892,970.29 2857,1005.29 2857,2137.64 2941,2221.64 2941,2535.15 3251.85,2846 3976.26,2846 v1(4135.63,3005.37)
  Bottom Layer w12: v1@4130.83,3010.17 CON1.9@4130.83,3074.27
SDIO_D3: CON1.1 R2.1 U1.140 | length 3401.8
  Top Layer w8: v1(3629,2814) 3833,2814 v1(4028,3009)
  Top Layer w12: v1(4028,3009) R2.1@4028,3072.63
  Bottom Layer w8: U1.140@3172.17,703.5 3143.69,703.5 2908,939.19 2908,975.51 2872,1011.51 2872,2131.43 2954,2213.43 2954,2529.77 3238.23,2814 v1(3629,2814)
  Bottom Layer w12: v1@4028.87,3009.87 CON1.1@4028.87,3074.27
SDO: U5.9 U6.1 | length 191.4
  Top Layer w8: v1@542,560 542,656 U6.1@543,657
  Bottom Layer w8: U5.9@542,466 v1@542,560
  other v1: 542,565
SHIFT_CENTER: U3.10 U4.9 | length 514.4
  Top Layer w8: U3.10@5680.47,2996.46 v1@5748.54,2996.46 ; v1(6109,2972) 6189.61,2972 6190.61,2971 U4.9@6190.47,2970.87
  Bottom Layer w8: v1(5754,2994) 5872.09,2994 5894.09,2972 v1(6109,2972)
SPI2_INPUT_MISO: pad.4 U1.34 U3.9 | length 2562.6
  Top Layer w8: v1(3942,1745) 3956,1731 3956,1593 3950,1587 v1(3956,1587) ; v1(5392,2766) 5504,2766 5680.47,2942.47 U3.9@5680.47,2970.87
  Bottom Layer w8: U1.34@3894.61,1485 3894.61,1525.61 v1(3956,1587) ; v1(3942,1745) 4078,1745 5099,2766 v1(5392,2766)
SPI2_INPUT_SCK: pad.5 U1.93 U3.2 U4.2 | length 5950.3
  Top Layer w8: v1(4014,435) 4043,406 4129,406 4184.5,461.5 4413.5,461.5 4440,435 6008,435 6053,480 6053,1107 5477,1683 5477,2445 5212,2710 5212,2974.4 5353,3115.4 v1(5353,3122) ; v1@5353,3124.41 U3.2@5460,3124.41 U3.2@5459.41,3125 ; v1(5888.73,3115.72) 5897.41,3124.41 U4.2@5970,3124.41
  Bottom Layer w8: U1.93@4012.72,492.88 4012.72,436.28 v1(4014,435) ; 5367.64,3125 5524,3125 5551,3098 5704,3098 5730.41,3124.41 5732.5,3122.32 5882.13,3122.32 v1(5888.73,3115.72)
SPI3_MUSIC_MOSI: pad.2 U1.150 U5.5 | length 2999.5
  Top Layer w8: v1(1168,1051) 1274.21,1051 1373.21,1150 1903,1150 2010,1043 v1(2335,1043) ; v1(2782,1056) 2913,1056 2923,1066 v1(2927,1066)
  Bottom Layer w8: U5.5@742,466 742,513 779,550 779.43,550 1012,782.57 1012,1004 1059,1051 v1(1168,1051) ; v1(2335,1043) 2346,1054 2784,1054 v1(2782,1056) ; v1(2927,1066) 2927,1062 3088.65,900.35 U1.150@3172.17,900.35
SPI3_MUSIC_SCK: pad.3 U1.161 U5.6 | length 3034.2
  Top Layer w8: v1(1100,1094) 1296,1094 1405,1203 1871.21,1203 1984.21,1090 v1(2336,1090) ; v1(2789,1099) 2805,1115 v1(2927,1115)
  Bottom Layer w8: U5.6@692,466 692,489 768,565 773.21,565 990,781.79 990,1067 1017,1094 v1(1100,1094) ; v1(2336,1090) 2780,1090 v1@2792,1102 ; v1(2789,1099) v1@2795,1099 ; v1(2927,1115) 2946,1115 2947.89,1116.89 U1.161@3172.17,1116.89
SPI5_LCD_MOSI: CON2.A11 pad.6 U1.27 | length 1843.1
  Top Layer w8: CON2.A11@3028,2411.15 3028,2468 v1(3045,2485) ; v1@3136.59,2592.59 3169,2625 3399,2625 v1(3405,2631) ; v1(3591,1855) 3591,1854 3788,1657 v1@3788,1587
  Bottom Layer w8: v1(3045,2485) 3045,2502 3135,2592 v1(3136,2592) ; v1(3405,2631) 3431,2631 3559,2503 3559,2429 3591,2397 v1(3591,1855) ; U1.27@3756.81,1485 3756.81,1547.81 v1@3793.5,1584.5
  other v1: 3791,1587
SPI5_LCD_SCK: CON2.A10 pad.7 U1.25 | length 1439.9
  Top Layer w8: CON2.A10@3007,2409.84 3009,2407.84 v1(3009,2345) ; v1(3381,1830) 3471,1830 3711,1590 v1(3711,1578)
  Bottom Layer w8: v1(3009,2345) 3009,1931 3007,1929 3106,1830 v1(3381,1830) v1@3381,1824.72 ; v1(3711,1578) 3711,1566 3717.44,1559.56 U1.25@3717.44,1485
"STATUS_OUT 0": LED0.A U1.7 | length 1234.8
  Top Layer w8: LED0.A@2799,962.9 2799,1005.77 2758.5,1046.27 2758.5,1383.5 v1(2941,1566) ; v1(3304,1614) 3337,1581 v1(3338,1581)
  Bottom Layer w8: v1(2941,1566) 2989,1614 v1(3304,1614) ; v1(3338,1581) 3342,1581 3363.11,1559.89 U1.7@3363.11,1485
"STATUS_OUT 1": LED1.A U1.8 | length 1412.3
  Top Layer w8: LED1.A@2534,967.9 2534,1217 v1(2955,1638) ; v1(3314,1646) 3314,1644 3355,1603 v1(3355,1611)
  Bottom Layer w8: v1(2955,1638) 2963,1646 v1(3314,1646) ; v1(3355,1611) 3355,1603 3382.79,1575.21 U1.8@3382.79,1485
SWCLK: P2.2 U1.137 | length 362.4
  Bottom Layer w8: P2.2@2939,430 3023,514 3023,583 3084.45,644.45 U1.137@3172.17,644.45
SWDIO: P2.4 U1.124 | length 648.2
  Top Layer w8: P2.4@2939,230 3045,336 3370.96,336 3401.89,366.93
  Top Layer w10: 3403.48,366.52 3405,368.04 v1(3405,423)
  Bottom Layer w10: U1.124@3403.48,493.88 3405,492.36 v1(3405,423)
TOUCH_NINT: CON3.5 U1.45 | length 1503.2
  Top Layer w8: CON3.5@4417.48,2642.28 4417.48,2350.52 4489,2279 v1(4489,1558)
  Bottom Layer w8: U1.45@4164.29,1412.17 4202.17,1412.17 4353,1563 4484,1563 v1(4489,1558)
U8A_B: C45.2 D1.A R29.2 U8.2 | length 605.3
  Top Layer w8: C45.2@1368.53,731 1429,731 1489.12,791.12 D1.A@1566,791.12 ; R29.2@1569,904.63 1569,794.12 D1.A@1566,791.12 ; U8.2@1778,656.41 1777.59,656 1718,656 1582.88,791.12 D1.A@1566,791.12
U8B_B: C50.2 D2.K R33.1 U8.5 | length 1223.6
  Top Layer w8: C50.2@1368.53,647 1408,647 1510,545 1510,379.37 R33.1@1566,323.37 ; D2.K@1566,483.88 R33.1@1566,323.37 ; U8.5@1852.8,656.41 1892.59,656.41 1896,653 1896,448 1800,352 1602.63,352 R33.1@1570,319.37 R33.1@1566,323.37
U9A_B: C52.2 D3.A R36.2 U9.2 | length 1469.5
  Top Layer w8: C52.2@1365.53,426 v1(1469,529.47)
  Bottom Layer w8: v1(1469,529.47) 1469,851 1516.63,898.63 R36.2@1569,898.63 D3.A@1569,803.12 1897.88,803.12 1986.5,714.5 1986.5,543.5 1912.41,469.41 U9.2@1856,469.41
U9B_B: C56.2 D4.K R40.1 U9.5 | length 599.8
  Top Layer w8: C56.2@1365.53,342 1431,342 v1(1445,328)
  Bottom Layer w8: v1(1445,328) 1560.37,328 1569,319.37 D4.K@1569,486.88 1677.12,486.88 1694.59,469.41 U9.5@1781.2,469.41
UART1_DEBUG_RX: P_Debug.1 U1.121 | length 7229.3
  Top Layer w8: v1(3480,309) 3638,309 3844,103 6223,103 6460,340 6513,340 6830,657 P_Debug.1@6830,4030
  Bottom Layer w8: U1.121@3461.53,492.88 3461.53,327.47 v1(3480,309)
UART1_DEBUG_TX: P_Debug.2 U1.120 | length 7264.5
  Top Layer w8: v1(3489,357) 3611.21,357 3850.21,118 6216.79,118 6453.79,355 6506.79,355 6764.84,613.06 6764.84,1465.37 6763,1467.21 6763,4063 P_Debug.2@6830,4130
  Bottom Layer w8: U1.120@3481.22,492.88 3481.22,364.78 v1(3489,357)
UART6_MULTI_RX: P_Multi.1 U1.116 | length 7516
  Bottom Layer w8: U1.116@3559.96,492.88 3559.96,242.04 3712,90 6502,90 6648,236 6648,496.79 6830,678.79 6830,3585 P_Multi.1@6385,4030
UART6_MULTI_TX: P_Multi.2 U1.115 | length 7595.1
  Bottom Layer w8: U1.115@3579.64,492.88 3579.64,245.36 3712,113 6481,113 6630,262 6630,500 6814,684 6814,3462 6314,3962 6314,4059 P_Multi.2@6385,4130
VCAP1: C14.1 U1.81 | length 138.7
  Top Layer w10: C14.1@4164.53,703 4208,703 4219,714 v1(4230,714)
  Bottom Layer w10: U1.81@4165.29,704.51 4209.51,704.51 4219,714 v1(4230,714)
VCAP2: C15.1 U1.125 | length 247.7
  Top Layer w15: v1(3433,391) C15.1@3433,484.47
  Bottom Layer w12: U1.125@3382.79,492.88 3382.79,438.79 3373,429 3373,411 3393,391
  Bottom Layer w15: 3393,391 v1(3433,391)
XTI: C39.2 R25.1 U5.21 Y3.2 | length 692.8
  Top Layer w8: R25.1@586.37,1335 655.06,1266.31 Y3.2@655.06,1065
  Bottom Layer w8: U5.21@592,820.33 592,901 655.06,964.06 Y3.2@655.06,1065 ; Y3.2@658,1067.94 C39.2@658,1191.47
XTO: C34.2 R25.2 U5.20 Y3.1 | length 689.5
  Top Layer w8: Y3.1@462.94,1065 462.94,1290.31 R25.2@507.63,1335
  Bottom Layer w8: Y3.1@460,1067.94 C34.2@460,1191.47 ; Y3.1@462.94,1065 462.94,980.06 542,901 U5.20@542,820.33
pads on no net: CON1.0 CON2.A5 CON2.A6 CON2.A7 CON2.A39 CON2.A40 CON2.A43 CON2.A44 CON2.A45 CON2.A46 CON2.A47 CON2.A48 CON2.A49 CON2.A50 CON2.A51 U1.1 U1.4 U1.5 U1.13 U1.24 U1.32 U1.33 U1.35 U1.40 U1.41 U1.42 U1.43 U1.44 U1.46 U1.53 U1.54 U1.55 U1.58 U1.59 U1.83 U1.84 U1.85 U1.86 U1.87 U1.89 U1.92 U1.94 U1.95 U1.123 U1.128 U1.130 U1.134 U1.138 U1.145 U1.152 U1.153 U1.156 U1.157 U1.160 U1.162 U1.163 U1.167 U1.168 U1.169 U1.170 U1.173 U1.174 U2.6 U2.19 U2.31 U3.7 U4.7

## Polygon pours and split planes (outlines as drawn)
3V3P on Top Layer "3V3_Decouple" (solid, remove dead copper, pour order 4): 607,3654 607,3289 615,3281 727,3281 727,3284 741,3298 745,3302 745,3655
5V0P on Top Layer "5V0_Decouple" (solid, remove dead copper, pour order 6): 947,3651 947,3288 946,3287 951,3282 1091,3282 1091,3648 1090,3649
GND on GND (split plane): 6922.9,4273.9 6922.9,20.1 20.1,20.1 20.1,3140 20.1,4273.91
3V3P on 3V3P (split plane): 6922.9,4273.9 6922.9,20.1 20.1,20.1 20.1,3140 20.1,4273.91

## Keep-outs
Keep-Out Layer:
  lines w7.87: 0,0 0,3140 0,4297 1847,4297 5757,4297 6943,4297 6943,3480 6943,0

## Other copper
GND (plane layer: these items are gaps in the copper):
  rectangle: 0,0 0,3140

## Silkscreen, mask and mechanical layers (free items; w line width, h text height)
Top Overlay:
  text "Riley Duffy" at 86,4129 h80
  text "Super GameBro Rev A" at 4667,4118 h80
  text "Brandon Pollack" at 86,3969 h80
  text "VCC" at 5976,3612 h30
  text "GND" at 5707,3609 h30